# Altium PCB PCB_Rotary-Encoder-PCB-Breakout_2025-10-18.pcbdoc
Units mil, origin at the board's own origin, x right, y up, seen from the top; angles counter-clockwise.
Board outline 2676.73 x 2235 mil, 2 copper layers (Top Layer, Bottom Layer); 7 components, 7 nets, 22 pads, 0 vias.
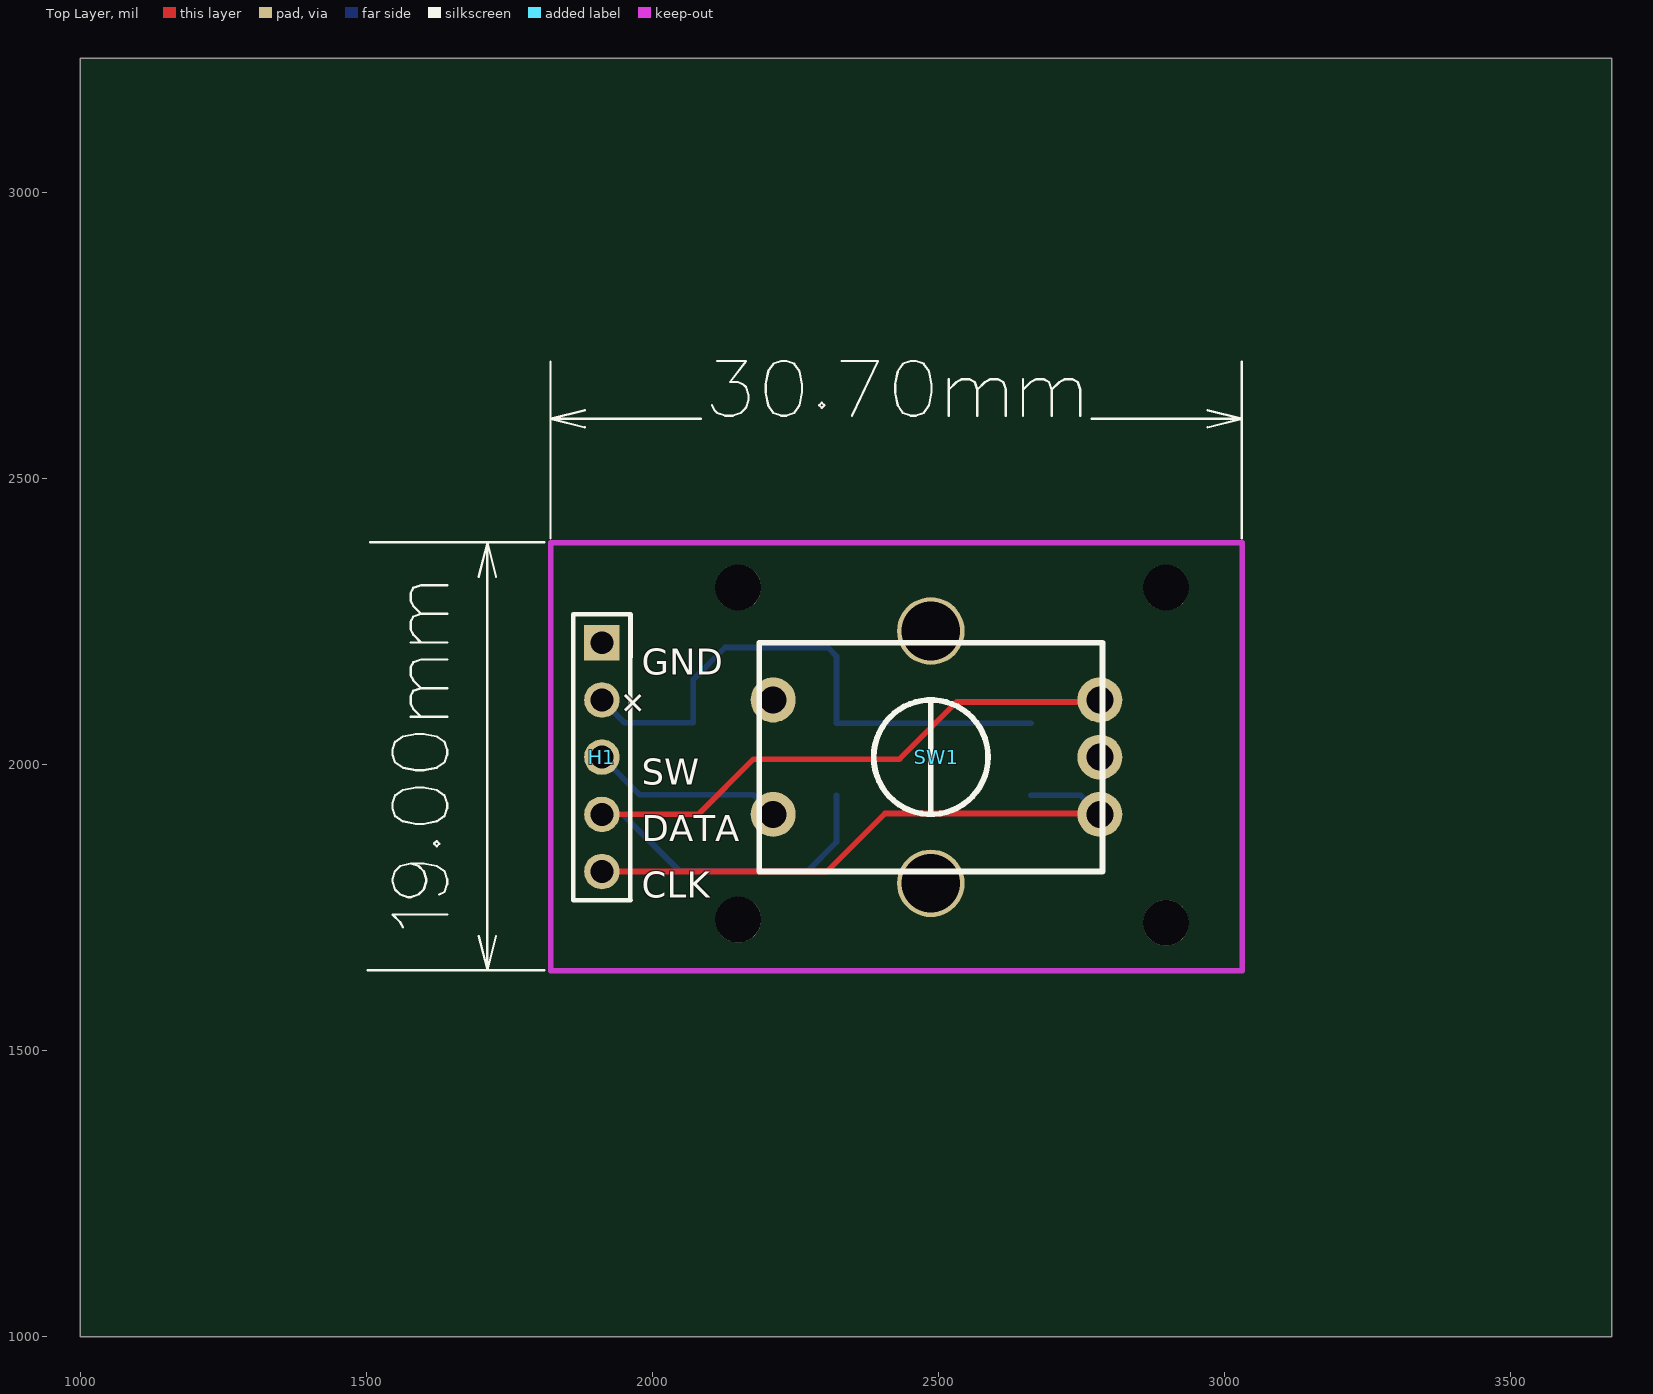
[diagram p0: Top Layer view]
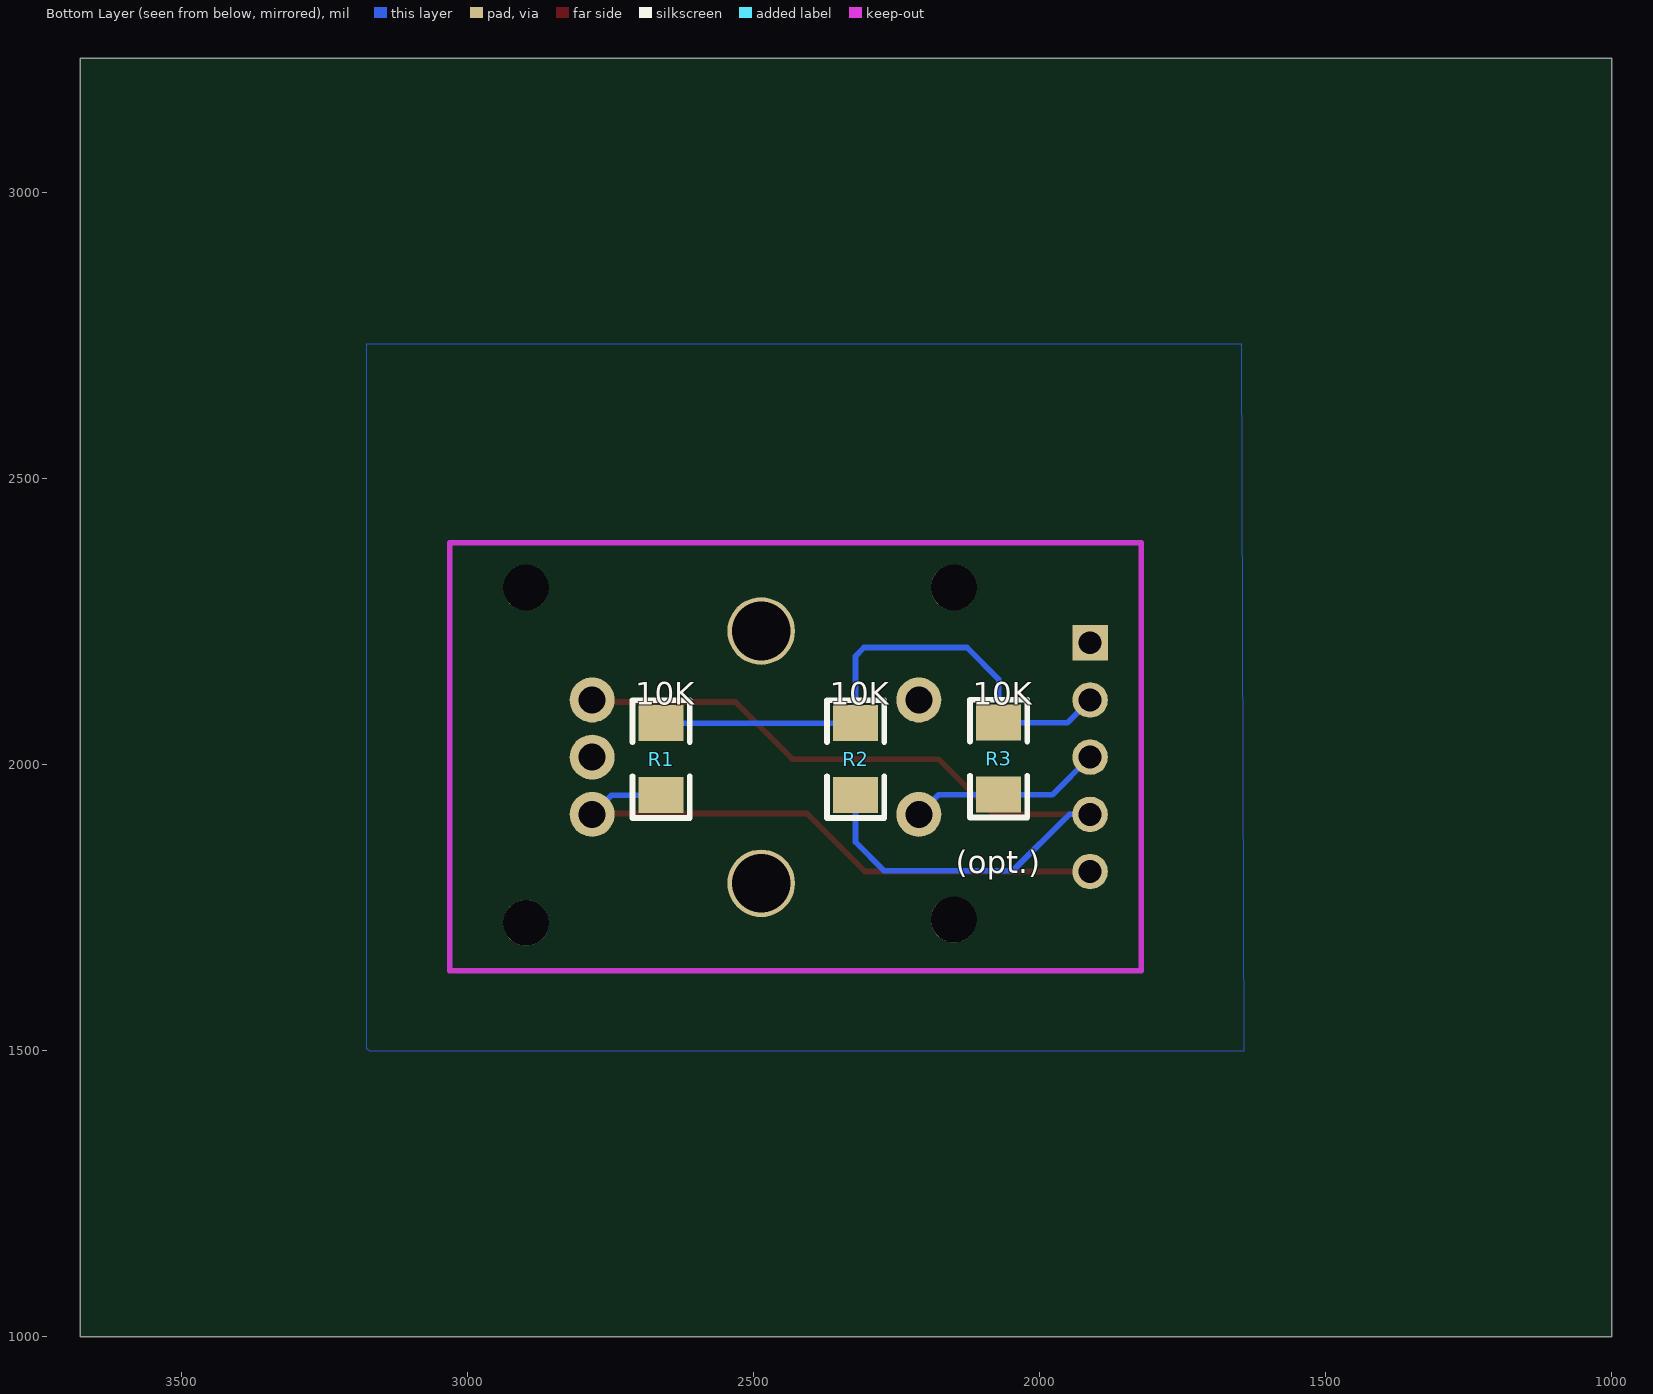
[diagram p1: Bottom Layer view, seen from below]

## Layer stack, top to bottom
Top Layer: signal copper (thickness not stored)
Dielectric: dielectric 12.6, FR-4, Dk 4.8
Bottom Layer: signal copper (thickness not stored)

## Board outline
3676.73,1000 1000,1000 1000,3235 3676.73,3235

## Components (designator, comment, footprint, x,y, rotation, side; value= is the part's Value field where it differs from the comment)
H1 "Header-Female-2.54_1x5" HDR-5X1/2.54 1911.58,2013.51 r270 top
R1 "10K" R1206_1 2661.73,2010 r270 bottom
R2 "10K" R1206_1 2321.73,2010 r270 bottom
R3 "10K" R1206_1 2071.58,2010.81 r270 bottom
SW1 "PEC12R-4230F-S0024" PEC12R-4230F-S0024 2496.58,2013.51 r90 top
? "" ? 2426.06,2551.02 r0 top
? "" ? 1656.73,2015 r0 top

## Footprints (in the part's own frame and the unit in brackets; to place one, negate y for a bottom-side part, rotate by r counter-clockwise, add the part's x,y. Pads: shape width x height; smd on the part's side, far side on the other; paste and mask are expansions set on the pad)
HDR-5X1/2.54 [mil]
  rect 62x62 hole 40.16 paste+0 mask+4: 1(-200,0)
  round 62 hole 40.16 paste+0 mask+4: 2(-100,0) 3(0,0) 4(100,0) 5(200,0)
  silkscreen extent -250,-50 250,50
PEC12R-4230F-S0024 [mm]
  round 2 hole 1.2 paste+0 mask+0.102: 1(-2.54,7.25) 2(2.54,7.25) A(-2.54,-7.25) B(2.54,-7.25) C(0,-7.25)
  round 3 hole 2.6 paste+0 mask+0.102: 6(-5.601,0.25) 7(5.601,0.25)
  silkscreen extent -5.08,-7.37 5.08,7.87
R1206_1 [mil]
  rect 63x78.74 smd paste+0 mask+1.97: 1(62.99,0) 2(-62.99,0)
  silkscreen extent -103,-50 103,50
? [mil]
  silkscreen extent -604,-155 604,155

## Free pads (board coordinates)
  round 80 hole 80 unplated paste+0: ""(2149.76,1729.49) ""(2149.76,2310) ""(2897.79,1723.98) ""(2897.79,2310)

## Nets (pads, with @x,y where several pads share a name; then routed paths per layer and width w, separated by ;. In a path a pad name is that pad's centre, name@x,y a point inside that pad or via, vN(x,y) a via of type N, cw(c..) or ccw(c..) an arc to the next point about the centre after c; other vN are vias at no path point)
CLK: H1.5 R1.1 SW1.A | length 1047.3
  Top Layer w10: H1.5 2305.24,1813.51 2406.73,1915 2780.53,1915 SW1.A
  Bottom Layer w10: R1.1 2748.52,1947.01 SW1.A
DATA: H1.4 R2.1 SW1.B | length 1507.1
  Top Layer w10: H1.4@1911.53,1913.5 2080.23,1913.5 2176.73,2010 2431.73,2010 2531.73,2110 2778.53,2110 SW1.B
  Bottom Layer w10: H1.4@1911.53,1913.5 1948.23,1913.5 2046.73,1815 2271.73,1815 2321.73,1865 R2.1
GND: H1.1 SW1.2 SW1.C
S$41: 
S$44: 
SW: H1.3 R3.1 SW1.1 | length 341
  Bottom Layer w10: H1.3 1977.26,1947.82 R3.1 2176.81,1947.82 SW1.1
VCC: H1.2 R1.2 R2.2 R3.2 | length 988.7
  Bottom Layer w10: H1.2 1951.28,2073.8 R3.2 2071.58,2149.84 2126.73,2205 2306.73,2205 2321.73,2190 R2.2 R1.2
pads on no net: SW1.6 SW1.7

## Polygon pours and split planes (outlines as drawn)
GND on Bottom Layer (solid): 1646.73,2735 3176.73,2735 3176.73,1505 3171.73,1500 1641.73,1500

## Silkscreen, mask and mechanical layers (free items; w line width, h text height)
Top Overlay:
  text "GND" at 1981.73,2157.5 h45
  text "+" at 1997.64,2102.99 h45 r135
  text "SW" at 1981.73,1965.55 h45
  text "DATA" at 1981.73,1866.52 h45
  text "CLK" at 1981.73,1767.5 h45
Bottom Overlay:
  text "(opt.)" at 2146.73,1810.32 h39.37